# Altium PCB new_food_box_board.PcbDoc (part 1 of 2)
Units mil, origin at the board's own origin, x right, y up, seen from the top; angles counter-clockwise.
Board outline 2685 x 2040 mil, 4 copper layers (Top Layer, Int1 (GND), Int2 (PWR), Bottom Layer), stack 53.912 mil thick; 76 components, 57 nets, 292 pads, 22 vias.
Unrouted connection lines stored in the file: 200.
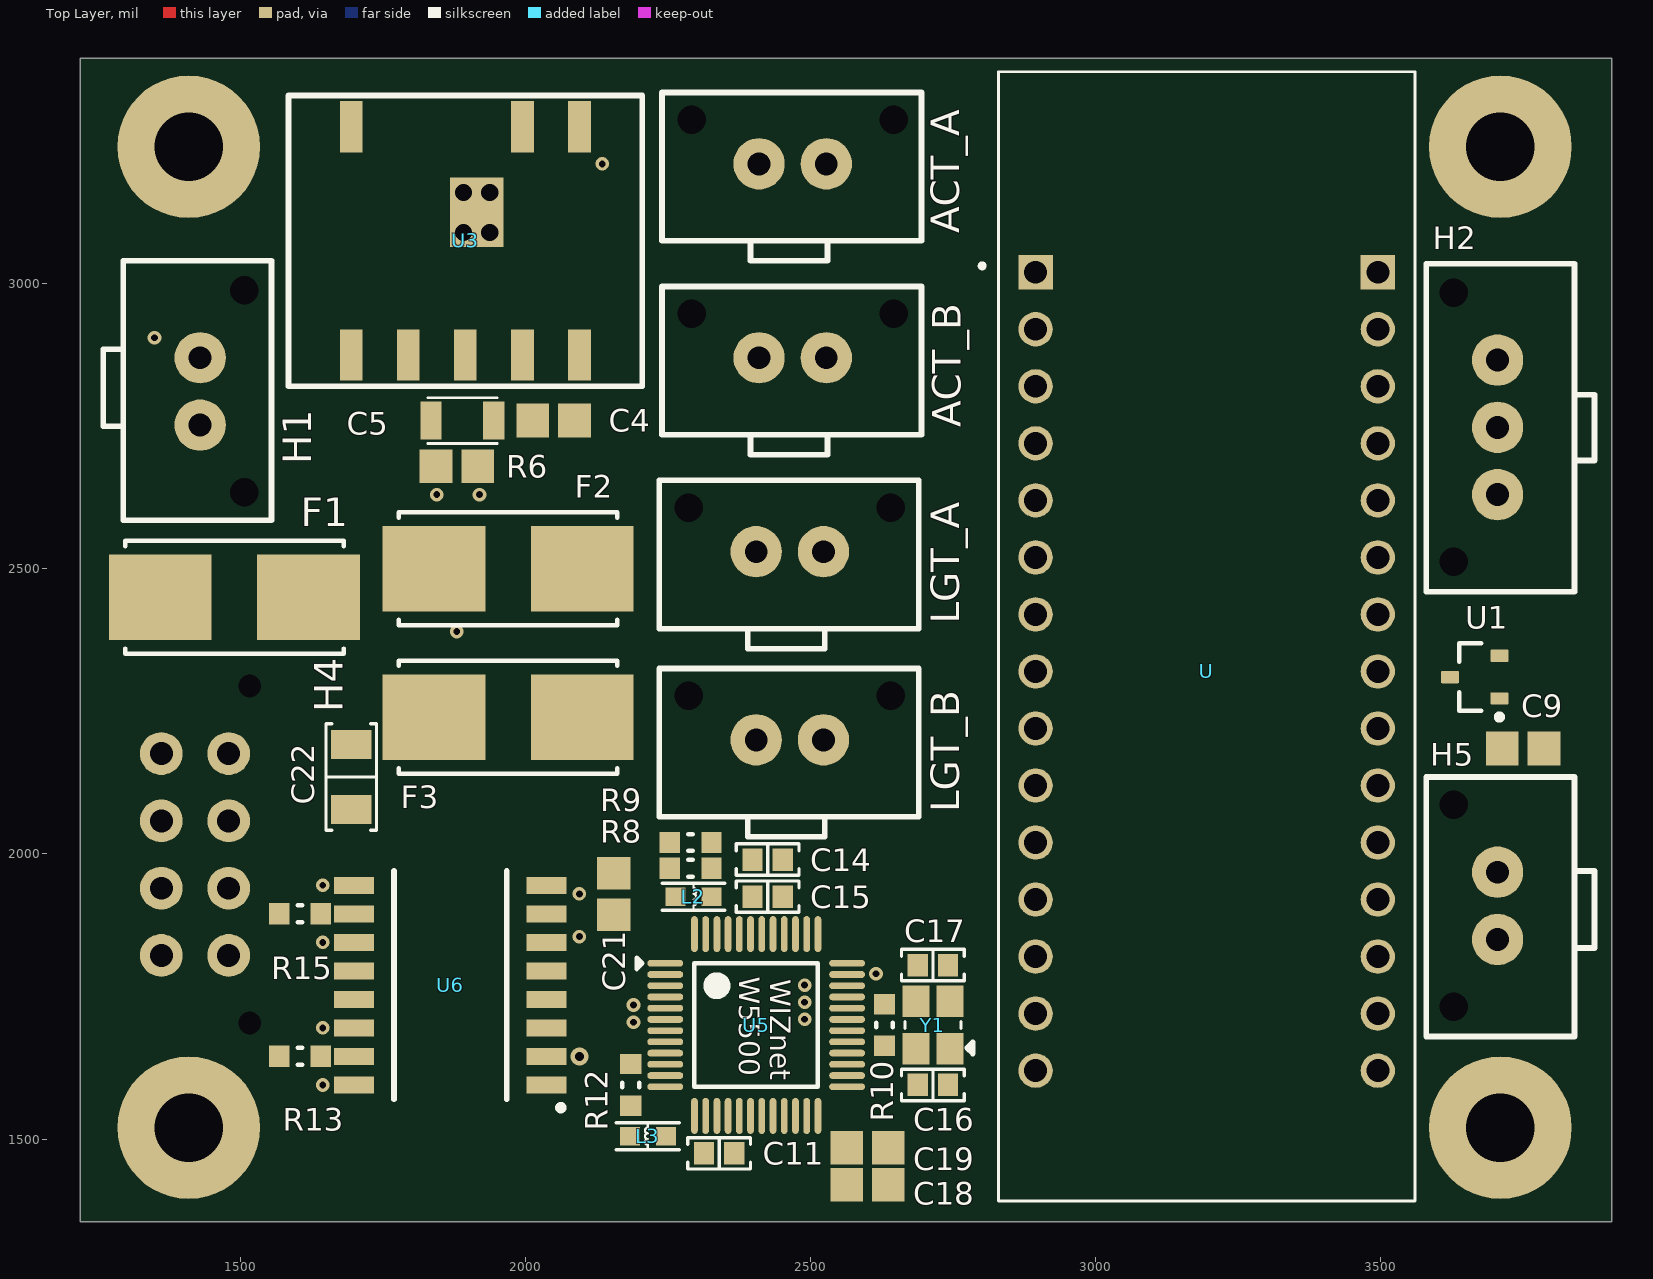
[diagram p0: Top Layer view]
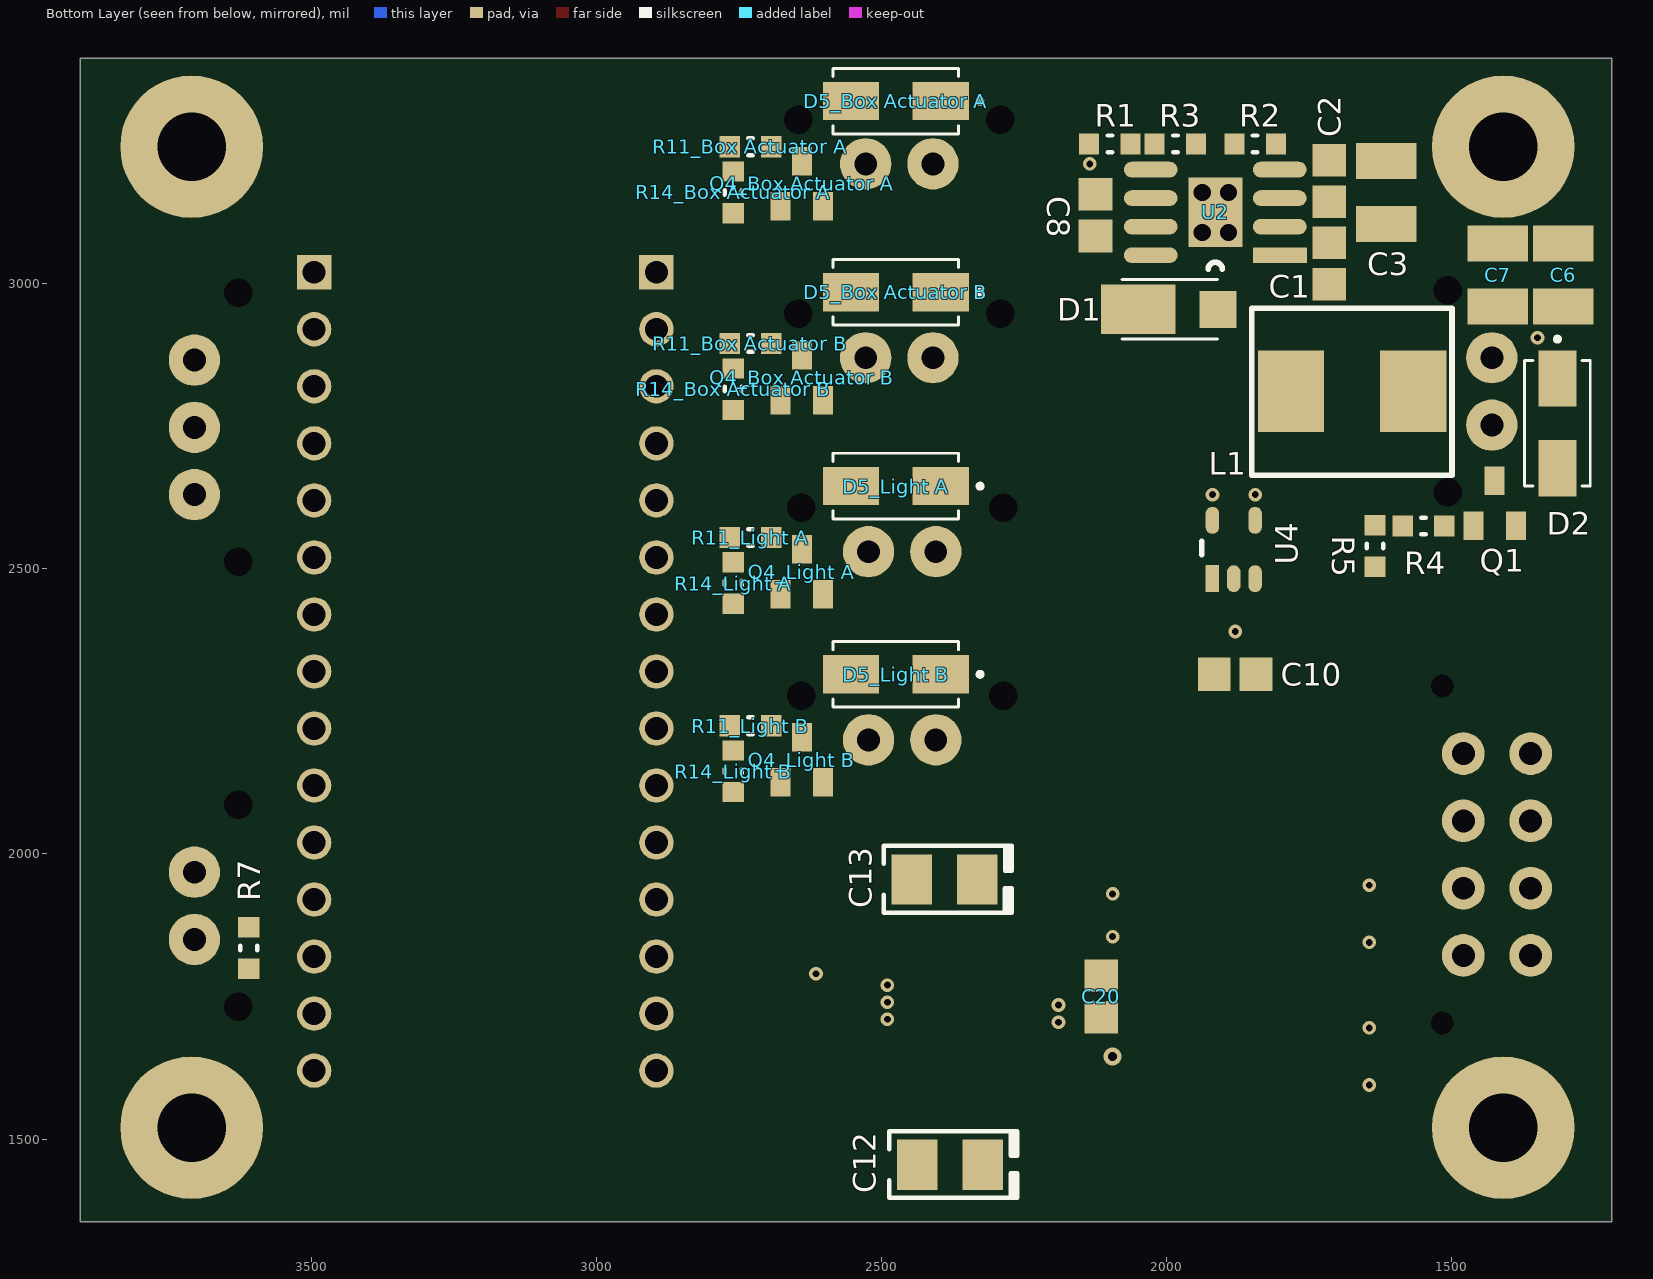
[diagram p1: Bottom Layer view, seen from below]

## Layer stack, top to bottom
Top Solder: solder mask 1, SM-001, Dk 4
Top Layer: signal copper 1.378
Dielectric 1: prepreg 5.1, PP-017, Dk 4.3
Dielectric 2: prepreg 5.1, PP-017, Dk 4.3
Int1 (GND): signal copper 1.378
Dielectric 3: core 28, Core-039, Dk 4.8
Int2 (PWR): signal copper 1.378
Dielectric 4: prepreg 5.1, PP-017, Dk 4.3
Dielectric 5: prepreg 5.1, PP-017, Dk 4.3
Bottom Layer: signal copper 1.378
Bottom Solder: solder mask 1, SM-001, Dk 4

## Board outline
1220,1355 3905,1355 3905,3395 1220,3395

## Design rules (kind name [scope] priority, off if disabled: settings)
BoardOutlineClearance JLC_BoardOutlineClearance_Silk [OnLayer('Top Overlay')  or   OnLayer('Bottom Overlay')] p1: gap=0 ignorepadtopadclearanceinfootprint=FALSE
BoardOutlineClearance JLC_BoardOutlineClearance_Single [All] p2: gap=15.75 ignorepadtopadclearanceinfootprint=FALSE except(0: Arc-SplitContinuation Track-SplitContinuation SMDPad-SplitContinuation THPad-SplitContinuation Via-SplitContinuation Fill-SplitContinuation Poly-SplitContinuation Region-SplitContinuation Text-SplitContinuation; 7.87: Arc-OutlineEdge Track-OutlineEdge SMDPad-OutlineEdge THPad-OutlineEdge Via-OutlineEdge Fill-OutlineEdge Poly-OutlineEdge Region-OutlineEdge Text-OutlineEdge)
BoardOutlineClearance JLC_BoardOutlineClearance_Panel [All] p3: gap=15.75 ignorepadtopadclearanceinfootprint=FALSE except(0: Arc-SplitContinuation Track-SplitContinuation SMDPad-SplitContinuation THPad-SplitContinuation Via-SplitContinuation Fill-SplitContinuation Poly-SplitContinuation Region-SplitContinuation Text-SplitContinuation)
Clearance JLC_Clearance_SB [(HasFootprint('0603 Solder Bridge-Footprint-1'))] p1: gap=5 ignorepadtopadclearanceinfootprint=FALSE except(0: Fill-Hole Poly-Hole Region-Hole Text-Hole; 10: SMDPad-Fill SMDPad-Poly SMDPad-Region THPad-Fill THPad-Poly THPad-Region Via-Fill Via-Poly Via-Region)
Clearance JLC_Clearance_Top [All] p2: gap=5 ignorepadtopadclearanceinfootprint=FALSE except(0: Fill-Hole Poly-Hole Region-Hole Text-Hole; 10: SMDPad-Fill SMDPad-Poly SMDPad-Region THPad-Fill THPad-Poly THPad-Region Via-Fill Via-Poly Via-Region Fill-Fill Fill-Poly Fill-Region Poly-Poly Poly-Region Region-Region)
ComponentClearance JLC_ComponentClearance [All] p1: gap=0 collisioncheckmode=3 verticalgap=0 showdistances=FALSE
ComponentOrientations JLC_ComponentOrientations [All] p1: allowedrotations=32
DiffPairsRouting [All] p1: maxlimit=10 minlimit=10 mostfreqgap=10 toplayer_minwidth=15 toplayer_maxwidth=15 toplayer_prefwidth=15 midlayer1_minwidth=15 midlayer1_maxwidth=15 midlayer1_prefwidth=15 midlayer2_minwidth=15 midlayer2_maxwidth=15 midlayer2_prefwidth=15 bottomlayer_minwidth=15 bottomlayer_maxwidth=15 bottomlayer_prefwidth=15 maxuncoupledlength=500
Height JLC_Height [All] p1: minheight=0 maxheight=99999 prefheight=500
HoleSize JLC_HoleSize [All] p1: absolutevalues=TRUE maxlimit=39370.08 minlimit=12 maxpercent=80.000 minpercent=20.000
HoleToHoleClearance JLC_HoleToHoleClearance [All] p1: gap=12 allowstackedmicrovias=TRUE
MinimumAnnularRing JLC_MinimumAnnularRing [All] p1: minimumring=3
MinimumSolderMaskSliver JLC_MinimumSolderMaskSliver [All] p1: minsoldermaskwidth=0
PolygonConnect [All] p1: connectstyle=Relief reliefconductorwidth=10 reliefentries=4 polygonreliefangle="90 Angle" airgapwidth=10
RoutingVias JLC_RoutingVias [All] p1: holewidth=15 width=25 viastyle="Through Hole" minholewidth=12 minwidth=24 maxholewidth=248 maxwidth=500
SilkToSilkClearance JLC_SilkToSilkClearance [All] p1: silktosilkclearance=0
SilkToSolderMaskClearance JLC_SilkToSolderMaskClearance [IsPad] p1: minsilkscreentomaskgap=0 clearancetoexposedcopper=TRUE
SolderMaskExpansion [All] p1: expansion=4 istentingtop=FALSE
Width JLC_Width [All] p1: maxlimit=500 minlimit=5 preferedwidth=10
22 further rules are at their usual default settings.

## Classes and differential pairs
channel class actuator: "Box Actuator A" "Box Actuator B" "Light A" "Light B"
component class "Power Supply": C1 C2 C3 C4 C5 C6 C7 C8 D1 F1 L1 R1 R2 R3 U2 U3
component class "Light B": "D5_Light B" LGT_B "Q4_Light B" "R11_Light B" "R14_Light B"
component class "Light A": "D5_Light A" LGT_B "Q4_Light A" "R11_Light A" "R14_Light A"
component class I/O: C9 C10 D2 F2 F3 H1 H2 H5 Q1 R4 R5 R6 R7 U1 U4
component class Ethernet: C11 C12 C13 C14 C15 C16 C17 C18 C19 C20 C21 C22 H4 L2 L3 R8 R9 R10 R12 R13 R15 U5 U6 Y1
component class Controller: U
component class "Box Actuator B": ACT_B "D5_Box Actuator B" "Q4_Box Actuator B" "R11_Box Actuator B" "R14_Box Actuator B"
component class "Box Actuator A": ACT_A "D5_Box Actuator A" "Q4_Box Actuator A" "R11_Box Actuator A" "R14_Box Actuator A"
differential pair ETH_TX: +ETH_TX_P -ETH_TX_N
differential pair ETH_RX: +ETH_RX_P -ETH_RX_N
differential pair CHP_TX: +CHP_TX_P -CHP_TX_N
differential pair CHP_RX: +CHP_RX_P -CHP_RX_N

## Components (designator, comment, footprint, x,y, rotation, side; value= is the part's Value field where it differs from the comment)
ACT_A "MOLEX_43650_2" MOLEX_43650_2 2410,3210 r180 top locked (schematic designator H3)
ACT_B "MOLEX_43650_2" MOLEX_43650_2 2410,2870 r180 top locked (schematic designator H3)
C1 "value" "CAP 0805 L" 1715,3035 r270 bottom
C2 "value" "CAP 0805 L" 1715,3180 r270 bottom
C3 "value" 1210 1615,3160 r270 bottom
C4 "value" "CAP 0805 L" 2050,2760 r0 top
C5 "value" 1206_CAP 1890,2760 r180 top
C6 "value" 1210 1305,3015 r270 bottom
C7 "value" 1210 1420,3015 r270 bottom
C8 "value" "CAP 0805 L" 2125,3120 r90 bottom value=22nF
C9 "value" "CAP 0805 L" 3750,2185 r180 top
C10 "value" "CAP 0805 L" 1880,2315 r180 bottom
C11 "0.1µF" "CAP 0603_1608" 2340,1475 r0 top
C12 "10µF" "CAP POL 1411_3528" 2380,1455 r0 bottom
C13 "10µF" "CAP POL 1411_3528" 2390,1955 r0 bottom
C14 "0.1µF" "CAP 0603_1608" 2425,1990 r180 top
C15 "0.1µF" "CAP 0603_1608" 2425,1925 r180 top
C16 "18pF" "CAP 0603_1608" 2715,1595 r0 top
C17 "18pF" "CAP 0603_1608" 2715,1805 r180 top
C18 "4.7uF" "CAP 0805 L" 2600,1420 r180 top
C19 "4.7uF" "CAP 0805 L" 2600,1485 r180 top
C20 "0.1uF" "CAP 0805 L" 2115,1750 r270 bottom
C21 "0.1uF" "CAP 0805 L" 2155,1930 r270 top
C22 "1000pF" "CAP 1206_3216 - 1.8MM" 1695,2135 r270 top
D1 "D Schottky" DO-221BC 1995,2955 r180 bottom
D2 "S1M-13-F" SMA 1315,2755 r270 bottom
"D5_Box Actuator A" "S1M-13-F" SMA 2475,3320 r0 bottom (schematic designator D5)
"D5_Box Actuator B" "S1M-13-F" SMA 2475,2985 r0 bottom (schematic designator D5)
"D5_Light A" "S1M-13-F" SMA 2475,2645 r0 bottom (schematic designator D5)
"D5_Light B" "S1M-13-F" SMA 2475,2315 r0 bottom (schematic designator D5)
F1 "0154005.DRT" Littelfuse_0154_0 1490,2450 r0 top
F2 "0154001.DRT" Littelfuse_0154_0 1970,2500 r0 top locked
F3 "0154001.DRT" Littelfuse_0154_0 1970,2240 r0 top
H1 "MOLEX_43650_2" MOLEX_43650_2 1430,2870 r90 top locked
H2 "POS" MOLEX_43650_3 3705,2630 r270 top
H4 "43045_8P" MOLEX_43045_2X4 1480,1940 r270 top locked
H5 "MOLEX_43650_2" MOLEX_43650_2 3705,1850 r270 top locked
L1 "Inductor Iron" SRP7050TA 1675,2811 r180 bottom locked
L2 "BLM18KG102SZ1D" IND-0603 2295,1925 r0 top
L3 "BLM18KG102SZ1D" IND-0603 2215,1505 r180 top
LGT_A "MOLEX_43650_2" MOLEX_43650_2 2405,2530 r180 top locked (schematic designator H3)
LGT_B "MOLEX_43650_2" MOLEX_43650_2 2405,2200 r180 top locked (schematic designator H3)
Q1 "MOSFET-N" SOT23-3 1425,2615 r180 bottom
"Q4_Box Actuator A" "MOSFET-N" SOT23-3 2640,3175 r180 bottom (schematic designator Q4)
"Q4_Box Actuator B" "MOSFET-N" SOT23-3 2640,2835 r180 bottom (schematic designator Q4)
"Q4_Light A" "MOSFET-N" SOT23-3 2640,2495 r180 bottom (schematic designator Q4)
"Q4_Light B" "MOSFET-N" SOT23-3 2640,2165 r180 bottom (schematic designator Q4)
R1 "Res1" "RES 0603 L" 2100,3245 r0 bottom
R2 "Res1" "RES 0603 L" 1845,3245 r180 bottom
R3 "Res1" "RES 0603 L" 1985,3245 r0 bottom
R4 "value" "RES 0603 L" 1550,2575 r180 bottom
R5 "value" "RES 0603 L" 1635,2540 r90 bottom
R6 "10mR" "CAP 0805 L" 1880,2680 r180 top
R7 "value" "RES 0603 L" 3610,1835 r270 bottom
R8 "4.7K" "RES 0603 L" 2290,1975 r0 top
R9 "4.7K" "RES 0603 L" 2290,2020 r0 top
R10 "1M" "RES 0603 L" 2630,1700 r90 top
"R11_Box Actuator A" "value" "RES 0603 L" 2730,3240 r0 bottom (schematic designator R11)
"R11_Box Actuator B" "value" "RES 0603 L" 2730,2895 r0 bottom (schematic designator R11)
"R11_Light A" "value" "RES 0603 L" 2730,2555 r0 bottom (schematic designator R11)
"R11_Light B" "value" "RES 0603 L" 2730,2225 r0 bottom (schematic designator R11)
R12 "12.4K" "RES 0603 L" 2185,1595 r90 top
R13 "75" "RES 0603 L" 1605,1645 r0 top
"R14_Box Actuator A" "value" "RES 0603 L" 2760,3160 r90 bottom (schematic designator R14)
"R14_Box Actuator B" "value" "RES 0603 L" 2760,2815 r90 bottom (schematic designator R14)
"R14_Light A" "value" "RES 0603 L" 2760,2475 r90 bottom (schematic designator R14)
"R14_Light B" "value" "RES 0603 L" 2760,2145 r90 bottom (schematic designator R14)
R15 "75" "RES 0603 L" 1605,1895 r0 top
U "NUCLEO-L432KC" MODULE_NUCLEO-L432KC 3195,2381.61 r0 top locked
U1 "LM61CIM3/NOPB" DBZ0003A_L 3665,2310 r180 top
U2 "LMR14050" HSOIC-8 1801.81,3050 r0 bottom
U3 "DC-DC_3v3" V78E-1000-SMT 1595,3075 r0 top locked
U4 "INA186" SOT23-5 1920,2482.64 r90 bottom
U5 "W5500" "WIZNET W5500" 2405,1700 r270 top locked
U6 "H1102NL" H1102NL 2037.5,1595 r180 top
Y1 "25MHz" OSC-82J0626 2715,1700 r90 top

## Footprints (in the part's own frame and the unit in brackets; to place one, negate y for a bottom-side part, rotate by r counter-clockwise, add the part's x,y. Pads: shape width x height; smd on the part's side, far side on the other; paste and mask are expansions set on the pad)
1206_CAP [mm] "RESC3115X65N"
  rect 0.95x1.7 smd: 1(-1.4,0) 2(1.4,0)
  silkscreen extent -1.55,-1.02 1.55,1.02
1210 [mm]
  rect 1.6x2.7 smd: 1(-1.4,0) 2(1.4,0)
"CAP 0603_1608" [mm] "Chip Capacitor, 2-Leads, Body 1.60x0.80mm, IPC Medium Density"
  rect 0.9x1 smd: 1(-0.675,0) 2(0.675,0)
  silkscreen extent -1.4,-0.7 1.4,0.7, body extent -0.8,-0.41 0.8,0.41, height 0.82
"CAP 0805 L" [mm] "Chip Capacitor, 2-Leads, Body 2.00x1.25mm, IPC Low Density"
  rect 1.45x1.5 smd: 1(-0.925,0) 2(0.925,0)
  body extent -1.05,-0.67 1.05,0.67, height 1.35
"CAP 1206_3216 - 1.8MM" [mm] "Chip Capacitor, 2-Leads, Body 3.25x1.60mm, IPC Medium Density"
  rect 1.3x1.8 smd: 1(-1.45,0) 2(1.45,0)
  silkscreen extent -2.37,-1.12 2.37,1.12, body extent -1.6,-0.8 1.6,0.8, height 1.8
"CAP POL 1411_3528" [mm] "Molded Capacitor, 2-Leads, Body 3.50x2.80mm, IPC Medium Density"
  rect 1.8x2.23 smd: 1(-1.46,0) 2(1.46,0)
  silkscreen extent -3,-1.5 2.71,1.48, body extent -1.86,-1.45 1.87,1.45, height 2
DBZ0003A_L [mm] "SOT23, 3-Leads, Body 3.04x1.4mm, Pitch 0.95mm, IPC High Density"
  rrect18% 0.8x0.55 smd: 1(-1.1,0.95) 2(-1.1,-0.95) 3(1.1,0)
  silkscreen extent -1.23,-1.5 0.7,1.9, body extent -1.26,-1.46 1.26,1.46, height 0.96
DO-221BC [mil]
  rect 65x65 smd: 1(85,0)
  rect 130x86.61 smd: 2(-55,0)
  silkscreen extent -84,-52 84,52, body extent -101,-52 104,50, height 39
H1102NL [mil]
  rect 70x30 smd: 1(0,0) 2(0,-50) 3(0,-100) 4(0,-150) 5(0,-200) 6(0,-250) 7(0,-300) 8(0,-350) 9(337.5,-350) 10(337.5,-300) 11(337.5,-250) 12(337.5,-200) 13(337.5,-150) 14(337.5,-100) 15(337.5,-50) 16(337.5,0)
  Top Layer pour cut-out: -40,75 375,75 375,-425 -40,-425
  Bottom Layer pour cut-out: -40,75 375,75 375,-425 -40,-425
  silkscreen extent -30,-375 268,45, body extent -17,-425 358,75, height 234
HSOIC-8 [mm]
  rect 2.4x0.7 smd: 1(0,0)
  oval 2.4x0.7 smd: 2(0,-1.27) 3(0,-2.54) 4(0,-3.81) 5(5.75,-3.81) 6(5.75,-2.54) 7(5.75,-1.27) 8(5.75,0)
  rect 2.4x3.1 smd: 7(2.87,-1.905)
  rect 2.4x3.1 smd far side: 7(2.875,-1.905)
  silkscreen extent 2.56,0.32 3.19,0.64, body extent -0.12,-4.35 5.88,0.55, height 1.57
IND-0603 [mm] "Inductor 0603(1608)"
  rect 0.89x0.82 smd: 1(-0.8,0) 2(0.8,0)
  silkscreen extent -1.4,-0.6 1.4,0.6, body extent -0.8,-0.4 0.8,0.4, height 0.95
Littelfuse_0154_0 [mil]
  rect 180x150 smd paste+0 mask+0: 1(-130,0) 2(130,0)
  silkscreen extent -192,-99 192,99, body extent -213,-103 213,103, height 10
MODULE_NUCLEO-L432KC [mm]
  rect 1.53x1.53 hole 1.02: CN3_1(-7.62,16.215) CN4_1(7.62,16.215)
  round 1.53 hole 1.02: CN3_2(-7.62,13.675) CN3_3(-7.62,11.135) CN3_4(-7.62,8.595) CN3_5(-7.62,6.055) CN3_6(-7.62,3.515) CN3_7(-7.62,0.975) CN3_8(-7.62,-1.565) CN3_9(-7.62,-4.105) CN3_10(-7.62,-6.645) CN3_11(-7.62,-9.185) CN3_12(-7.62,-11.725) CN3_13(-7.62,-14.265) CN3_14(-7.62,-16.805) CN3_15(-7.62,-19.345) CN4_2(7.62,13.675) CN4_3(7.62,11.135) CN4_4(7.62,8.595) CN4_5(7.62,6.055) CN4_6(7.62,3.515) CN4_7(7.62,0.975) CN4_8(7.62,-1.565) CN4_9(7.62,-4.105) CN4_10(7.62,-6.645) CN4_11(7.62,-9.185) CN4_12(7.62,-11.725) CN4_13(7.62,-14.265) CN4_14(7.62,-16.805) CN4_15(7.62,-19.345)
  silkscreen extent -10.1,-25.14 9.27,25.14, body extent -9.27,-25.78 9.27,26.23, height 6.38
MOLEX_43045_2X4 [mil] "MOLEX 43045 3.0mm 8P"
  round 0 hole 40: 0(-354.5,37) 0(236.5,37)
  round 75 hole 40: 1(118,-118) 2(0,-118) 3(-118,-118) 4(-236,-118) 5(118,0) 6(0,0) 7(-118,0) 8(-236,0)
  body extent -378,-215 258,130, height 391
MOLEX_43650_2 [mil] "Molex Microfit 3.0 2P"
  round 40 hole 50: 0(-236,-77) 0(118,-77)
  round 90 hole 40: 1(0,0) 2(-118,0)
  silkscreen extent -285,-125 170,170, body extent -250,-95 130,126, height 395
MOLEX_43650_3 [mil] "Molex Microfit 3MM connector 3-pin"
  round 40 hole 50: 0(-354,-77) 0(118,-77)
  round 90 hole 40: 1(0,0) 2(-118,0) 3(-236,0)
  silkscreen extent -405,-125 170,170, body extent -367,-97 131,123, height 395
OSC-82J0626 [mm]
  rect 1.4x1.2 smd: 1(-1.05,-0.75) 2(1.05,-0.75) 3(1.05,0.75) 4(-1.05,0.75)
  silkscreen extent -1.27,-1.78 0.15,1.25, body extent -1.7,-1.35 1.7,1.35, height 1.06
"RES 0603 L" [mm] "Chip Resistor, 2-Leads, Body 1.60x0.80mm, IPC Low Density"
  rect 0.9x0.95 smd: 1(-0.925,0) 2(0.925,0)
  silkscreen extent -0.1,-0.38 0.1,0.38, body extent -0.8,-0.4 0.8,0.4, height 0.45
SMA [mm]
  rect 2.5x1.7 smd: 1(2,0) 2(-2,0)
  silkscreen extent -3.85,-1.46 2.8,1.46, body extent -2.64,-1.46 2.64,1.46, height 2.41
SOT23-3 [mm]
  rect 0.889x1.27 smd: 1(0,1) 2(-0.95,-1) 3(0.95,-1)
  body extent -1.45,-1.27 1.45,1.13, height 0.96
SOT23-5 [mm]
  rect 1.2x0.6 smd: 1(0,0)
  oval 1.2x0.6 smd: 2(0,-0.95) 3(0,-1.9) 4(2.6,-1.9) 5(2.6,0)
  silkscreen extent 1.06,0.48 1.66,0.48, body extent -0.33,-2.44 2.87,0.56, height 0.92
SRP7050TA [mil] "Bourns SRP7050TA series"
  rect 116.5x143 smd: 1(-107.25,0) 2(107.25,0)
  silkscreen extent -176,-147 175,146, body extent -144,-130 144,130, height 181
V78E-1000-SMT [mil]
  rect 40x90 smd: 1(100,200) 2(300,-200) 2(400,200) 3(100,-200) 3(200,-200) 4(400,-200) 4(500,-200) 5(500,200)
  silkscreen extent -10,-255 610,255, body extent 0,-224 600,224, height 326
"WIZNET W5500" [mm]
  oval 0.3x1.6 smd: 1(-2.75,-4.05) 2(-2.25,-4.05) 3(-1.75,-4.05) 4(-1.25,-4.05) 5(-0.75,-4.05) 6(-0.25,-4.05) 7(0.25,-4.05) 8(0.75,-4.05) 9(1.25,-4.05) 10(1.75,-4.05) 11(2.25,-4.05) 12(2.75,-4.05) 25(2.75,4.05) 26(2.25,4.05) 27(1.75,4.05) 28(1.25,4.05) 29(0.75,4.05) 30(0.25,4.05) 31(-0.25,4.05) 32(-0.75,4.05) 33(-1.25,4.05) 34(-1.75,4.05) 35(-2.25,4.05) 36(-2.75,4.05)
  oval 1.6x0.3 smd: 13(4.05,-2.75) 14(4.05,-2.25) 15(4.05,-1.75) 16(4.05,-1.25) 17(4.05,-0.75) 18(4.05,-0.25) 19(4.05,0.25) 20(4.05,0.75) 21(4.05,1.25) 22(4.05,1.75) 23(4.05,2.25) 24(4.05,2.75) 37(-4.05,2.75) 38(-4.05,2.25) 39(-4.05,1.75) 40(-4.05,1.25) 41(-4.05,0.75) 42(-4.05,0.25) 43(-4.05,-0.25) 44(-4.05,-0.75) 45(-4.05,-1.25) 46(-4.05,-1.75) 47(-4.05,-2.25) 48(-4.05,-2.75)
  silkscreen extent -3,-5.32 2.75,2.75, body extent -4.5,-4.5 4.5,4.5, height 1.65

## Part data
ACT_A ACT_B H1 H5 LGT_A LGT_B: "MOLEX - 43650-0227 - Wire-To-Board Connector, 3 mm, 2 Contacts, Header, Micro-Fit 3.0 43650 Series, Through Hole, 1 Rows", Color=Black, Manufacturer=Molex, Manufacturer Part Number=43650-0227, Max Operating Temperature=105°C, Min Operating Temperature=-40°C, Package Quantity=3264, Supplier Part Number 1=WM10656-ND, Category=Connectors, ComponentLink1Description=https://datasheet.ciiva.com/6840/436500227-sd-6840390.pdf?src-supplier=Digi-Key, ComponentLink1URL=https://datasheet.ciiva.com/6840/436500227-sd-6840390.pdf?src-supplier=Digi-Key, ComponentLink2Description=https://datasheet.ciiva.com/3944/28290436500227-pcb-headers-3944690.pdf?src-supplier=Arrow, ComponentLink2URL=https://datasheet.ciiva.com/3944/28290436500227-pcb-headers-3944690.pdf?src-supplier=Arrow, ComponentLink3Description=https://datasheet.ciiva.com/30077/0436500227-pcb-headers-30077244.pdf?src-supplier=Onlinecomponents.com, ComponentLink3URL=https://datasheet.ciiva.com/30077/0436500227-pcb-headers-30077244.pdf?src-supplier=Onlinecomponents.com, ComponentLink4Description=https://datasheet.ciiva.com/7920/1629867-7920765.pdf?src-supplier=Element14, ComponentLink4URL=https://datasheet.ciiva.com/7920/1629867-7920765.pdf?src-supplier=Element14, Connector Type="Header,Male Pin", Contact Material=Brass, Contact Plating=Tin,Bright, Contact Shape=Square, Depth=5.57mm, Fastening Type=Ramp, Housing Material=Thermoplastic, Insulation Material=Polymer, Length=9.65mm, Mount="Through Hole", Number of Contacts=2, Number of Ports=1, Number of Positions=2, Number of Rows=1, Number of Terminals=2, Orientation=Straight, Packaging=Tray, Pitch=3mm, Pricing 1="1=0.80000, 10=0.74800, 100=0.57340, 500=0.49860, 1000=0.41135, 5000=0.36149, 10000=0.33656 (USD)", Supplier 1=Digi-Key, Termination=Solder
C1 C2: library part "CAP 0805", "CAP CER 0.1UF 50V X7R 0805", Capacitance=0.1uF, Case/Package=0805, Dielectric=X7R, Manufacturer=Samsung, Manufacturer Part Number=CL21B104KBC5PNL, Max Operating Temperature=125°C, Min Operating Temperature=-55°C, Supplier Part Number 1=1276-7000-1-ND, Tolerance=10%, Voltage=50V, Category="Ceramic Capacitors", ComponentLink1Description=https://datasheet.ciiva.com/15195/getdatasheetpartid-359581-15195873.pdf?src-supplier=Verical, ComponentLink1URL=https://datasheet.ciiva.com/15195/getdatasheetpartid-359581-15195873.pdf?src-supplier=Verical, Depth=1.25mm, Height=0.85mm, Length=2mm, Mount="Surface Mount", Packaging="Tape and Reel", Pricing 1="1=0.10000, 10=0.06800, 50=0.03720, 100=0.03040, 500=0.02168, 1000=0.01704, 2500=0.01549, 5000=0.01425 (USD)", Radiation Hardening=No, Supplier 1=Digi-Key
C3: library part "CAP 0805", "TDK - C3225X7R1H106M250AC - C3225X7R1H106MT000E", Capacitance=10uF, Case Code (Imperial)=1210, Case Code (Metric)=3225, Dielectric=X7R, Dielectric Material=Ceramic, Manufacturer=TDK, Manufacturer Part Number=C3225X7R1H106M250AC, Max Operating Temperature=125°C, Min Operating Temperature=-55°C, Package Quantity=1000, Supplier Part Number 1=445-14933-1-ND, Tolerance=20%, Voltage Rating=50V, Case/Package=1210, Category="Ceramic Capacitors", ComponentLink1Description=http://www.farnell.com/datasheets/2792994.pdf?src-supplier=Farnell, ComponentLink1URL=http://www.farnell.com/datasheets/2792994.pdf?src-supplier=Farnell, ComponentLink2Description=http://www.mouser.com/ds/2/400/tdk_mlcc_commercial_general_en-542463.pdf?src-supplier=Mouser, ComponentLink2URL=http://www.mouser.com/ds/2/400/tdk_mlcc_commercial_general_en-542463.pdf?src-supplier=Mouser, ComponentLink3Description=https://product.tdk.com/info/en/documents/chara_sheet/C3225X7R1H106M250AC.pdf?src-supplier=Digi-Key, ComponentLink3URL=https://product.tdk.com/info/en/documents/chara_sheet/C3225X7R1H106M250AC.pdf?src-supplier=Digi-Key, ComponentLink4Description=http://product.tdk.com/capacitor/mlcc/en/documents/mlcc_commercial_general_en.pdf?src-supplier=Avnet, ComponentLink4URL=http://product.tdk.com/capacitor/mlcc/en/documents/mlcc_commercial_general_en.pdf?src-supplier=Avnet, ComponentLink5Description=http://www.farnell.com/datasheets/1913358.pdf?src-supplier=Element14, ComponentLink5URL=http://www.farnell.com/datasheets/1913358.pdf?src-supplier=Element14, ComponentLink6Description=http://www.farnell.com/datasheets/2291921.pdf?src-supplier=Newark, ComponentLink6URL=http://www.farnell.com/datasheets/2291921.pdf?src-supplier=Newark, Height=2.5mm, Lead Free="Lead Free", Length=0.126inch, Mount="Surface Mount", Packaging="Tape and Reel", Pricing 1="1=1.03000, 10=0.78700, 50=0.65340, 100=0.56270, 500=0.43560 (USD)", REACH SVHC="No SVHC", Supplier 1=Digi-Key, Termination=SMD/SMT, Thickness=0.11inch, Voltage Rating (DC)=50V, Weight=0.000564oz, Width=0.098inch
C4: library part "CAP 0805", "CAP CER 22UF 10V X6S 0805", Capacitance=22uF, Case Code (Imperial)=0805, Case Code (Metric)=2012, Manufacturer=Murata, Manufacturer Part Number=GRT21BC81A226ME13L, Max Operating Temperature=105°C, Min Operating Temperature=-55°C, Ratings=AEC-Q200, Supplier Part Number 1=490-12342-1-ND, Tolerance=20%, Voltage Rating=10V, Case/Package=0805, Category="Ceramic Capacitors", ComponentLink1Description=http://search.murata.co.jp/Ceramy/image/img/A01X/G101/ENG/GRT21BC81A226ME13-01.pdf?src-supplier=Digi-Key, ComponentLink1URL=http://search.murata.co.jp/Ceramy/image/img/A01X/G101/ENG/GRT21BC81A226ME13-01.pdf?src-supplier=Digi-Key, Lead Free="Lead Free", Length=0.079inch, Mount="Surface Mount", Packaging="Tape and Reel", Pricing 1="1=0.61000, 10=0.42900, 50=0.32460, 100=0.28260, 500=0.20938, 1000=0.17796 (USD)", Supplier 1=Digi-Key, Thickness=0.057inch, Width=0.049inch
C5: library part "CAP 0805", "MURATA - GRT31CR61H106KE01L - SMD Multilayer Ceramic Capacitor, 10 µF, 50 V, 1206 [3216 Metric], ± 10%, X5R, GRT Series", Capacitance=10uF, Case Code (Imperial)=1206, Case Code (Metric)=3216, Dielectric=X5R, Manufacturer=Murata, Manufacturer Part Number=GRT31CR61H106KE01L, Max Operating Temperature=85°C, Min Operating Temperature=-55°C, Ratings=AEC-Q200, Supplier Part Number 1=490-12456-1-ND, Tolerance=10%, Voltage Rating=50V, Case/Package=1206, Category="Ceramic Capacitors", ComponentLink1Description=http://www.farnell.com/datasheets/2166010.pdf?src-supplier=Farnell, ComponentLink1URL=http://www.farnell.com/datasheets/2166010.pdf?src-supplier=Farnell, ComponentLink2Description=http://search.murata.co.jp/Ceramy/image/img/A01X/G101/ENG/GRT31CR61H106KE01-01.pdf?src-supplier=Digi-Key, ComponentLink2URL=http://search.murata.co.jp/Ceramy/image/img/A01X/G101/ENG/GRT31CR61H106KE01-01.pdf?src-supplier=Digi-Key, ComponentLink3Description=http://www.farnell.com/datasheets/2166010.pdf?src-supplier=Newark, ComponentLink3URL=http://www.farnell.com/datasheets/2166010.pdf?src-supplier=Newark, ComponentLink4Description=http://www.farnell.com/datasheets/2166010.pdf?src-supplier=Element14, ComponentLink4URL=http://www.farnell.com/datasheets/2166010.pdf?src-supplier=Element14, Length=0.126inch, Mount="Surface Mount", Packaging="Cut Tape", Pricing 1="1=0.73000, 10=0.51400, 50=0.38840, 100=0.33840, 500=0.25064, 1000=0.21304 (USD)", Supplier 1=Digi-Key, Thickness=0.071inch, Voltage Rating (DC)=50V, Width=0.063inch
C6 C7: library part "CAP 0805", "KEMET - C1210C476M4PACTU. - CAPACITOR CERAMIC 47UF, 16V, X5R, 1210", Capacitance=47uF, Case Code (Imperial)=1210, Case Code (Metric)=3225, Dielectric=X5R, Dielectric Material=Ceramic, Manufacturer=KEMET, Manufacturer Part Number=C1210C476M4PACTU, Max Operating Temperature=85°C, Min Operating Temperature=-55°C, Package Quantity=1, Supplier Part Number 1=399-5514-1-ND, Tolerance=20%, Voltage=16V, Case/Package=1210, Category="Ceramic Capacitors", ComponentLink1Description=https://datasheet.ciiva.com/22705/652158-22705488.pdf?src-supplier=Element14, ComponentLink1URL=https://datasheet.ciiva.com/22705/652158-22705488.pdf?src-supplier=Element14, ComponentLink2Description=https://datasheet.ciiva.com/28608/1918694-28608774.pdf?src-supplier=Element14, ComponentLink2URL=https://datasheet.ciiva.com/28608/1918694-28608774.pdf?src-supplier=Element14, Contact Plating=Tin,Matte, Depth=2.5mm, Dissipation Factor=10%, Height=2.5mm, Lead Free="Lead Free", Length=3.2mm, Mount="Surface Mount,PCB", Number of Pins=2, Packaging="Tape and Reel", Pricing 1="1=1.16000, 10=0.88500, 50=0.73500, 100=0.63300, 500=0.49006 (USD)", Radiation Hardening=No, REACH SVHC="No SVHC", Supplier 1=Digi-Key, Termination=SMD/SMT, Thickness=0.11inch, Voltage Rating=16V, Voltage Rating (DC)=16V, Width=0.098inch
C8: library part "CAP 0805", "CAP 0805", Manufacturer=Yageo, Manufacturer Part Number=AC0805KRX7R8BB223, Supplier Part Number 1=311-3170-1-ND, Voltage=25V, Pricing 1="1=0.24000, 10=0.16300, 100=0.08260, 500=0.05654, 1000=0.05001 (USD)", RoHS=No, Stock 1=1274, Supplier 1=Digi-Key
C9 C10: library part "CAP 0805", "SMD Multilayer Ceramic Capacitor, AEC-Q200 C Series, 0.1 F, 10%, X7R, 25 V, 0805 [2012 Metric] ;RoHS Compliant: Yes", Capacitance=100nF, Case Code (Imperial)=0805, Case Code (Metric)=2012, Dielectric=X7R, Dielectric Material=Ceramic, Manufacturer=KEMET, Manufacturer Part Number=C0805C104K3RACAUTO, Max Operating Temperature=125°C, Min Operating Temperature=-55°C, Package Quantity=1, Ratings=AEC-Q200, Supplier Part Number 1=399-6927-1-ND, Tolerance=10%, Voltage Rating=25V, Case/Package=0805, Category="Ceramic Capacitors", ComponentLink1Description=http://components.arrow.com/part/dataview/43510470S8189391N7429?src-supplier=Arrow, ComponentLink1URL=http://components.arrow.com/part/dataview/43510470S8189391N7429?src-supplier=Arrow, ComponentLink2Description=http://components.arrow.com/part/dataview/0323_00324902?src-supplier=Arrow+Europe, ComponentLink2URL=http://components.arrow.com/part/dataview/0323_00324902?src-supplier=Arrow+Europe, ComponentLink3Description=http://www.farnell.com/datasheets/2314205.pdf?src-supplier=Farnell, ComponentLink3URL=http://www.farnell.com/datasheets/2314205.pdf?src-supplier=Farnell, ComponentLink4Description=http://www.farnell.com/datasheets/2120825.pdf?src-supplier=Farnell, ComponentLink4URL=http://www.farnell.com/datasheets/2120825.pdf?src-supplier=Farnell, ComponentLink5Description=https://www.verical.com/server-webapp/html/getDatasheet?partID=469266&src-supplier=Verical, ComponentLink5URL=https://www.verical.com/server-webapp/html/getDatasheet?partID=469266&src-supplier=Verical, ComponentLink6Description=http://capacitoredge.kemet.com/capedge2/DataSheet?pn=C0805C104K3RACAUTO&src-supplier=Avnet+Europe, ComponentLink6URL=http://capacitoredge.kemet.com/capedge2/DataSheet?pn=C0805C104K3RACAUTO&src-supplier=Avnet+Europe, ComponentLink7Description=http://www.farnell.com/datasheets/2120825.pdf?src-supplier=Element14, ComponentLink7URL=http://www.farnell.com/datasheets/2120825.pdf?src-supplier=Element14, ComponentLink8Description=https://search.kemet.com/component-edge/download/datasheet/C0805C104K3RACAUTO.pdf?src-supplier=Digi-Key, ComponentLink8URL=https://search.kemet.com/component-edge/download/datasheet/C0805C104K3RACAUTO.pdf?src-supplier=Digi-Key, ComponentLink9Description=https://api.kemet.com/component-edge/download/datasheet/C0805C104K3RACAUTO.pdf?src-supplier=Digi-Key, ComponentLink9URL=https://api.kemet.com/component-edge/download/datasheet/C0805C104K3RACAUTO.pdf?src-supplier=Digi-Key, Depth=1.25mm, Height=0.9mm, Length=2mm, Mount="Surface Mount", Packaging="Tape and Reel", Pricing 1="1=0.18000, 10=0.12000, 50=0.07220, 100=0.06100, 500=0.04174, 1000=0.03693 (USD)", Radiation Hardening=No, REACH SVHC="No SVHC", Supplier 1=Digi-Key, Thickness=0.035inch, Voltage Rating (DC)=25V, Width=0.049inch
C11 C14 C15: library part C0603C104K5RACAUTO, "CAP CER 0.1UF 50V X7R 0603", Device Package="0603 (1608 Metric)", Manufacturer=KEMET, Operating Temperature="-55°C ~ 125°C", Ratings=AEC-Q200, Supplier Part Number 1=399-6856-1-ND, Temperature Coefficient=X7R, Tolerance=±10%, Voltage - Rated=50V, Applications="Automotive, Bypass, Decoupling", Capacitance=0.1µF, ComponentLink1Description=Datasheet, ComponentLink1URL=https://api.kemet.com/component-edge/download/specsheet/C0603C104K5RACAUTO.pdf, ComponentLink2Description="DigiKey Link", ComponentLink2URL=http://digikey.com/product-detail/en/kemet/C0603C104K5RACAUTO/399-6856-1-ND/3314369, LastUpdated="2020-01-21 12:01:46 AM", Lifecycle Status=Active, Minimum Order=1, Mounting Type="Surface Mount, MLCC", Package / Case="0603 (1608 Metric)", Packaging=TapeAndReel, Part Number=C0603C104K5RACAUTO, Part Status=Active, PartId=14977, Price=0.03, Series="SMD Auto X7R", Size / Dimension="0.063\" L x 0.031\" W (1.60mm x 0.80mm)", Supplier 1=DigiKey, Thickness (Max)="0.034\" (0.87mm)"
C12 C13: library part T491B106K016ATAUTO, "CAP TANT 10UF 10% 16V 1411", Device Package="1411 (3528 Metric)", ESR (Equivalent Series Resistance)=2.5Ohm, Lifetime @ Temp.="2000 Hrs @ 125°C", Manufacturer=KEMET, Manufacturer Size Code=B, Operating Temperature="-55°C ~ 125°C", Ratings=AEC-Q200, Supplier Part Number 1=399-18036-1-ND, Tolerance=±10%, Voltage - Rated=16V, Capacitance=10µF, ComponentLink1Description=Datasheet, ComponentLink1URL=https://api.kemet.com/component-edge/download/datasheet/T491B106K016ATAUTO.pdf, ComponentLink2Description="DigiKey Link", ComponentLink2URL=http://digikey.com/product-detail/en/kemet/T491B106K016ATAUTO/399-18036-1-ND/9342305, Features=Automotive, Height - Seated (Max)="0.083\" (2.10mm)", LastUpdated="2020-01-21 1:52:37 AM", Lifecycle Status=Active, Minimum Order=1, Mounting Type="Surface Mount", Package / Case="1411 (3528 Metric)", Packaging=TapeAndReel, Part Number=T491B106K016ATAUTO, Part Status=Active, PartId=1682, Price=0.15, Series=T491, Size / Dimension="0.138\" L x 0.110\" W (3.50mm x 2.80mm)", Supplier 1=DigiKey, Type=Molded
C16 C17: library part C0603C180J5GACAUTO, "CAP CER 18PF 50V C0G/NP0 0603", Device Package="0603 (1608 Metric)", Manufacturer=KEMET, Operating Temperature="-55°C ~ 125°C", Ratings=AEC-Q200, Supplier Part Number 1=399-16019-1-ND, Temperature Coefficient="C0G, NP0", Tolerance=±5%, Voltage - Rated=50V, Applications=Automotive, Capacitance=18pF, ComponentLink1Description=Datasheet, ComponentLink1URL=https://api.kemet.com/component-edge/download/datasheet/C0603C180J5GACAUTO.pdf, ComponentLink2Description="DigiKey Link", ComponentLink2URL=http://digikey.com/product-detail/en/kemet/C0603C180J5GACAUTO/399-16019-1-ND/7516518, Features="Low ESL", LastUpdated="2020-01-21 12:01:53 AM", Lifecycle Status=Active, Minimum Order=1, Mounting Type="Surface Mount, MLCC", Package / Case="0603 (1608 Metric)", Packaging=TapeAndReel, Part Number=C0603C180J5GACAUTO, Part Status=Active, PartId=12456, Price=0.02, Series="SMD Auto C0G", Size / Dimension="0.063\" L x 0.031\" W (1.60mm x 0.80mm)", Supplier 1=DigiKey, Thickness (Max)="0.034\" (0.87mm)"
C18 C19: library part "CAP 0805", "Cap Ceramic 4.7uF 16V X7R 10% Pad SMD 0805 125C Automotive T/R", Case Code (Imperial)=0805, Case Code (Metric)=2012, Manufacturer=KEMET, Manufacturer Part Number=C0805C475K4RACAUTO, Max Operating Temperature=125°C, Min Operating Temperature=-55°C, Ratings=AEC-Q200, Supplier Part Number 1=399-15711-1-ND, Tolerance=10%, Voltage Rating=16V, Capacitance=4.7uF, Case/Package=0805, Category="Ceramic Capacitors", ComponentLink1Description=http://www.farnell.com/datasheets/2741390.pdf?src-supplier=Farnell, ComponentLink1URL=http://www.farnell.com/datasheets/2741390.pdf?src-supplier=Farnell, ComponentLink2Description=http://www.farnell.com/datasheets/2741390.pdf?src-supplier=Newark, ComponentLink2URL=http://www.farnell.com/datasheets/2741390.pdf?src-supplier=Newark, ComponentLink3Description=http://www.farnell.com/datasheets/2741390.pdf?src-supplier=Element14, ComponentLink3URL=http://www.farnell.com/datasheets/2741390.pdf?src-supplier=Element14, ComponentLink4Description=https://api.kemet.com/component-edge/download/datasheet/C0805C475K4RACAUTO.pdf?src-supplier=Digi-Key, ComponentLink4URL=https://api.kemet.com/component-edge/download/datasheet/C0805C475K4RACAUTO.pdf?src-supplier=Digi-Key, Mount="Surface Mount", Packaging="Cut Tape", Supplier 1=Digi-Key
C20 C21: library part "CAP 0805", "Cap Ceramic 0.01uF 100V X7R 10% SMD 0805 125C Paper T/R", Capacitance=10nF, Case Code (Imperial)=0805, Case Code (Metric)=2012, Dielectric=X7R, Dielectric Material=Ceramic, Manufacturer=KEMET, Manufacturer Part Number=C0805C103K1RACAUTO, Max Operating Temperature=125°C, Min Operating Temperature=-55°C, Package Quantity=1, Ratings=AEC-Q200, Supplier Part Number 1=399-6922-1-ND, Tolerance=10%, Voltage Rating=100V, Case/Package=0805, Category="Ceramic Capacitors", ComponentLink1Description=https://datasheet.ciiva.com/7842/1693454-7842169.pdf?src-supplier=Element14, ComponentLink1URL=https://datasheet.ciiva.com/7842/1693454-7842169.pdf?src-supplier=Element14, Contact Plating=Tin,Matte, Depth=1.25mm, Height=0.78mm, Length=2mm, Mount="Surface Mount", Packaging="Tape and Reel", Radiation Hardening=No, REACH SVHC="No SVHC", Supplier 1=Digi-Key, Thickness=0.035inch, Voltage Rating (DC)=100V, Width=0.049inch
C22: library part C1206C102KGRACAUTO, "CAP CER 1000PF 2KV X7R 1206", Device Package="1206 (3216 Metric)", Manufacturer=KEMET, Operating Temperature="-55°C ~ 125°C", Ratings=AEC-Q200, Supplier Part Number 1=399-12976-1-ND, Temperature Coefficient=X7R, Tolerance=±10%, Voltage - Rated="2000V (2kV)", Applications="Automotive, Bypass, Decoupling", Capacitance=1000pF, ComponentLink1Description=Datasheet, ComponentLink1URL=https://api.kemet.com/component-edge/download/datasheet/C1206C102KGRACAUTO.pdf, ComponentLink2Description="DigiKey Link", ComponentLink2URL=http://digikey.com/product-detail/en/kemet/C1206C102KGRACAUTO/399-12976-1-ND/5762258, Features="Low ESL, High Voltage", LastUpdated="2020-01-21 12:03:47 AM", Lifecycle Status=Active, Minimum Order=1, Mounting Type="Surface Mount, MLCC", Package / Case="1206 (3216 Metric)", Packaging=TapeAndReel, Part Number=C1206C102KGRACAUTO, Part Status=Active, PartId=20361, Price=0.06, Series="SMD Auto X7R HV", Size / Dimension="0.126\" L x 0.063\" W (3.20mm x 1.60mm)", Supplier 1=DigiKey, Thickness (Max)="0.069\" (1.75mm)"
D1: "Schottky Diode", Average Rectified Current=4A, Forward Current=8A, Forward Voltage=570mV, Manufacturer="Vishay Semiconductors", Manufacturer Part Number=V8PAL50-M3/I, Max Forward Surge Current (Ifsm)=120A, Max Operating Temperature=150°C, Max Repetitive Reverse Voltage (Vrrm)=50V, Min Operating Temperature=-40°C, Package Quantity=14000, Peak Reverse Current=40mA, Supplier Part Number 1=V8PAL50-M3/ICT-ND, Code_JEDEC=DO-214-AA, ComponentLink1Description=https://datasheet.ciiva.com/29591/v8pal50-29591381.pdf?src-supplier=Digi-Key, ComponentLink1URL=https://datasheet.ciiva.com/29591/v8pal50-29591381.pdf?src-supplier=Digi-Key, ComponentLink2Description=https://datasheet.ciiva.com/29591/v8pal50-29591382.pdf?src-supplier=Digi-Key, ComponentLink2URL=https://datasheet.ciiva.com/29591/v8pal50-29591382.pdf?src-supplier=Digi-Key, ComponentLink3Description=https://datasheet.ciiva.com/29591/v8pal50-29591383.pdf?src-supplier=Digi-Key, ComponentLink3URL=https://datasheet.ciiva.com/29591/v8pal50-29591383.pdf?src-supplier=Digi-Key, Element Configuration=Single, Height=1mm, Length=4.35mm, Max Reverse Voltage (DC)=50V, Mount="Surface Mount", Number of Pins=2, PackageDescription="DO-214-AA/SMB; 2 C-Bend Leads; Body 5.3 x 3.6 mm, inc. leads (LxW)", Packaging="Tape and Reel", Peak Non-Repetitive Surge Current=120A, Pricing 1="1=0.87000, 10=0.76600, 25=0.72000, 100=0.52250, 250=0.50388, 500=0.43654, 1000=0.37152, 2500=0.34830, 5000=0.31347 (USD)", REACH SVHC=Unknown, RoHS=Yes, Stock 1=9149, Supplier 1=Digi-Key, Weight=0.001129oz, Width=2.7mm
D2 "D5_Box Actuator A" "D5_Box Actuator B" "D5_Light A" "D5_Light B": library part Diode, "Default Diode"
F1: "FUSE BRD MNT 5A 125VAC/VDC 2SMD", Case/Package=SMD/SMT, Color=White, Current Rating=5A, DC Cold Resistance=13.6mR, Flammability Rating="UL94 V-0", Manufacturer=Littelfuse, Manufacturer Part Number=0154005DRT, Max Operating Temperature=125°C, Min Operating Temperature=-55°C, Package Quantity=1500, Power Dissipation=125W, Supplier Part Number 1=F1310CT-ND, Voltage Rating=125V, Approvals=UL,PSE, Body Material=Ceramic,Thermoplastic, Category=Fuses, ComponentLink1Description=https://datasheet.ciiva.com/15187/getdatasheetpartid-71302-15187877.pdf?src-supplier=Verical, ComponentLink1URL=https://datasheet.ciiva.com/15187/getdatasheetpartid-71302-15187877.pdf?src-supplier=Verical, ComponentLink2Description=https://datasheet.ciiva.com/14159/aa154xxx-data-e-14159686.pdf?src-supplier=Distrelec, ComponentLink2URL=https://datasheet.ciiva.com/14159/aa154xxx-data-e-14159686.pdf?src-supplier=Distrelec, ComponentLink3Description=https://datasheet.ciiva.com/22712/1840330-22712966.pdf?src-supplier=Element14, ComponentLink3URL=https://datasheet.ciiva.com/22712/1840330-22712966.pdf?src-supplier=Element14, ComponentLink4Description=https://datasheet.ciiva.com/1268/1840330-1268664.pdf?src-supplier=Element14, ComponentLink4URL=https://datasheet.ciiva.com/1268/1840330-1268664.pdf?src-supplier=Element14, ComponentLink5Description=https://datasheet.ciiva.com/4483/littelfuse-fuse-154-154t-154l-154tl-datasheet-pdf-309941-4483517.pdf?src-supplier=Mouser, ComponentLink5URL=https://datasheet.ciiva.com/4483/littelfuse-fuse-154-154t-154l-154tl-datasheet-pdf-309941-4483517.pdf?src-supplier=Mouser, ComponentLink6Description=https://datasheet.ciiva.com/46406/1840330-46406109.pdf?src-supplier=Element14, ComponentLink6URL=https://datasheet.ciiva.com/46406/1840330-46406109.pdf?src-supplier=Element14, ComponentLink7Description=https://datasheet.ciiva.com/46406/1788337-46406175.pdf?src-supplier=Element14, ComponentLink7URL=https://datasheet.ciiva.com/46406/1788337-46406175.pdf?src-supplier=Element14, Depth=5.03mm, Fuse Current=5A, Fuse Type="Board Mount (Cartridge Style Excluded)", Height=3.81mm, Lead Free="Lead Free", Length=9.73mm, Mount="Surface Mount,Holder", Number of Pins=2, Packaging="Tape and Reel", Pricing 1="1=3.140000, 5=3.040000, 10=2.935000, 50=2.306200, 100=1.886900, 250=1.834520, 500=1.572460 (USD)", Radiation Hardening=No, REACH SVHC=Unknown, Supplier 1=Digi-Key, Terminal Material=Copper, Termination=SMD/SMT, Voltage Rating (AC)=125V, Voltage Rating (DC)=125V, Width=5.03mm, Working Voltage=125V
F2 F3: library part 0154005.DRT, "LITTELFUSE - 0154001.DRT - FUSE, SMD, 1A, OMNI BLOCK, TIME DELAY", Case/Package=SMD/SMT, Color=White, Current Rating=1A, DC Cold Resistance=225mR, Flammability Rating="UL94 V-0", Manufacturer=Littelfuse, Max Operating Temperature=125°C, Min Operating Temperature=-55°C, Package Quantity=1500, Power Dissipation=125W, Supplier Part Number 1=F1303TR-ND, Voltage Rating=125V, Approvals=UL,PSE, Body Material=Thermoplastic, Category=Fuses, ComponentLink1Description=https://datasheet.ciiva.com/1268/1840330-1268625.pdf?src-supplier=Element14, ComponentLink1URL=https://datasheet.ciiva.com/1268/1840330-1268625.pdf?src-supplier=Element14, ComponentLink2Description=https://datasheet.ciiva.com/4485/littelfuse-fuseblocks-154-155-4485399.pdf?src-supplier=Mouser, ComponentLink2URL=https://datasheet.ciiva.com/4485/littelfuse-fuseblocks-154-155-4485399.pdf?src-supplier=Mouser, ComponentLink3Description=https://datasheet.ciiva.com/14102/aa154xxx-data-e-14102970.pdf?src-supplier=Distrelec, ComponentLink3URL=https://datasheet.ciiva.com/14102/aa154xxx-data-e-14102970.pdf?src-supplier=Distrelec, ComponentLink4Description=https://datasheet.ciiva.com/46406/1840330-46406107.pdf?src-supplier=Element14, ComponentLink4URL=https://datasheet.ciiva.com/46406/1840330-46406107.pdf?src-supplier=Element14, ComponentLink5Description=https://datasheet.ciiva.com/46406/1788337-46406172.pdf?src-supplier=Element14, ComponentLink5URL=https://datasheet.ciiva.com/46406/1788337-46406172.pdf?src-supplier=Element14, ComponentLink6Description=https://datasheet.ciiva.com/22712/1840330-22712958.pdf?src-supplier=Element14, ComponentLink6URL=https://datasheet.ciiva.com/22712/1840330-22712958.pdf?src-supplier=Element14, Depth=5.03mm, Fuse Current=1A, Fuse Type="Board Mount (Cartridge Style Excluded)", Height=3.81mm, Lead Free="Lead Free", Length=9.73mm, Manufacturer Part Number=0154001.DRT, Mount="Surface Mount,Holder", Number of Pins=2, Packaging="Tape and Reel", Pricing 1="1500=1.31037, 3000=1.23890, 7500=1.19125 (USD)", Radiation Hardening=No, REACH SVHC=Unknown, Supplier 1=Digi-Key, Terminal Material=Copper, Voltage Rating (AC)=125V, Voltage Rating (DC)=125V, Width=5.03mm, Working Voltage=125V
H2: library part TERM_3P, "Stepper position potentiometer"
H4: library part TERM_2x4P
L1: "FIXED IND 4.7UH 6.5A 30.8 MOHM", Case/Package=Nonstandard, Current Rating=6.5A, DC Resistance (DCR)=30.8mR, Inductance=4.7uH, Inductance Tolerance=20%, Manufacturer=Bourns, Manufacturer Part Number=SRP7050TA-4R7M, Max Operating Temperature=150°C, Min Operating Temperature=-40°C, Ratings=AEC-Q200, Saturation Current=10A, Self Resonant Frequency=22MHz, Supplier Part Number 1=SRP7050TA-4R7MCT-ND, Test Frequency=100kHz, Category="Fixed Inductors", ComponentLink1Description=http://www.bourns.com/docs/Product-Datasheets/SRP7050TA.pdf?src-supplier=Digi-Key, ComponentLink1URL=http://www.bourns.com/docs/Product-Datasheets/SRP7050TA.pdf?src-supplier=Digi-Key, ComponentLink2Description=http://www.farnell.com/datasheets/1955472.pdf?src-supplier=Element14, ComponentLink2URL=http://www.farnell.com/datasheets/1955472.pdf?src-supplier=Element14, ComponentLink3Description=https://www.bourns.com/docs/Product-Datasheets/SRP7050TA.pdf?src-supplier=Digi-Key, ComponentLink3URL=https://www.bourns.com/docs/Product-Datasheets/SRP7050TA.pdf?src-supplier=Digi-Key, Composition=Wirewound, Core Material="Carbonyl Powder", Height - Seated (Max)=0.197inch, Length=0.287inch, Mount="Surface Mount", Packaging="Cut Tape", Pricing 1="1=1.42000, 10=1.32300, 25=1.22120, 50=1.01760, 100=0.95650, 250=0.85472 (USD)", REACH SVHC="No SVHC", RMS Current (Irms)=6.5A, Shielding=Shielded, Supplier 1=Digi-Key, Tolerance=20%, Width=0.26inch
L2 L3: library part IND-0603, "Ferrite Beads Multi-Layer Power 1KOhm 25% 100MHz 1A 200mOhm DCR 0603 Automotive T/R", Case Code (Imperial)=0603, Case Code (Metric)=1608, DC Resistance (DCR)=200mR, Manufacturer=Murata, Max Current Rating=1A, Max Operating Temperature=125°C, Min Operating Temperature=-55°C, Ratings=AEC-Q200, Supplier Part Number 1=490-17350-1-ND, Case/Package=0603, ComponentLink1Description=https://www.murata.com/~/media/webrenewal/support/library/catalog/products/emc/emifil/c51e.ashx?la=en-us&src-supplier=Digi-Key, ComponentLink1URL=https://www.murata.com/~/media/webrenewal/support/library/catalog/products/emc/emifil/c51e.ashx?la=en-us&src-supplier=Digi-Key, ComponentLink2Description=https://www.murata.com/en-us/products/productdata/8796750610462/QNFA9122.pdf?src-supplier=Digi-Key, ComponentLink2URL=https://www.murata.com/en-us/products/productdata/8796750610462/QNFA9122.pdf?src-supplier=Digi-Key, Manufacturer Part Number=BLM18KG102SZ1D, Mount="Surface Mount", Number of Lines=1, Packaging="Cut Tape", Supplier 1=Digi-Key
Q1: "MOSFET 12V N-Ch Enh FET 2426pF 27.3nC", Capacitance=2.426E-09F, Case/Package=TO-236-3, Continuous Drain Current (ID)=9.3A, Drain to Source Breakdown Voltage=12V, Drain to Source Resistance=41mR, Gate to Source Voltage (Vgs)=4.5V, Input Capacitance=2.426nF, Manufacturer=Diodes, Manufacturer Part Number=DMN1019USN-7, Max Operating Temperature=150°C, Max Power Dissipation=680mW, Min Operating Temperature=-55°C, Package Quantity=3000, Supplier Part Number 1=DMN1019USN-7DICT-ND, Category=MOSFETs, ComponentLink1Description=http://www.farnell.com/datasheets/2814395.pdf?src-supplier=Farnell, ComponentLink1URL=http://www.farnell.com/datasheets/2814395.pdf?src-supplier=Farnell, ComponentLink2Description=http://www.mouser.com/ds/2/115/DMN1019USN-336718.pdf?src-supplier=Mouser, ComponentLink2URL=http://www.mouser.com/ds/2/115/DMN1019USN-336718.pdf?src-supplier=Mouser, ComponentLink3Description=https://www.diodes.com/assets/Datasheets/DMN1019USN.pdf?src-supplier=Digi-Key, ComponentLink3URL=https://www.diodes.com/assets/Datasheets/DMN1019USN.pdf?src-supplier=Digi-Key, ComponentLink4Description=http://www.farnell.com/datasheets/2814395.pdf?src-supplier=Newark, ComponentLink4URL=http://www.farnell.com/datasheets/2814395.pdf?src-supplier=Newark, Drain to Source Voltage (Vdss)=12V, Element Configuration=Single, Fall Time=16.8ns, Lead Free="Lead Free", Mount="Surface Mount", Number of Channels=1, Packaging="Tape and Reel", Pricing 1="1=0.43000, 10=0.34700, 25=0.31800, 100=0.19960, 250=0.19740, 500=0.18482, 1000=0.12568 (USD)", Rds On Max=10mR, Rise Time=57.6ns, Supplier 1=Digi-Key, Turn-Off Delay Time=22.2ns, Turn-On Delay Time=7.6ns, Weight=0.000282oz
"Q4_Box Actuator A" "Q4_Box Actuator B" "Q4_Light A" "Q4_Light B": "Trans MOSFET N-CH 60V 2A Automotive 3-Pin SOT-23 T/R", Manufacturer=Vishay, Manufacturer Part Number=SQ2364EES-T1_GE3, Supplier Part Number 1=SQ2364EES-T1_GE3CT-ND, ComponentLink1Description=http://www.farnell.com/datasheets/2611857.pdf?src-supplier=Farnell, ComponentLink1URL=http://www.farnell.com/datasheets/2611857.pdf?src-supplier=Farnell, ComponentLink2Description=http://www.farnell.com/datasheets/2611857.pdf?src-supplier=Newark, ComponentLink2URL=http://www.farnell.com/datasheets/2611857.pdf?src-supplier=Newark, Pricing 1="1=0.58000, 10=0.49500, 25=0.46200, 100=0.34320, 250=0.32604, 500=0.26796, 1000=0.21780 (USD)", Supplier 1=Digi-Key
R1: "Res Thick Film 0603 91K Ohm 1% 1/10W ±100ppm/°C Molded SMD SMD Paper T/R", Case Code (Imperial)=0603, Case Code (Metric)=1608, Manufacturer=Vishay, Manufacturer Part Number=CRCW060391K0FKEA, Max Operating Temperature=155°C, Max Power Dissipation=100mW, Min Operating Temperature=-55°C, Package Quantity=10, Resistance=91k, Supplier Part Number 1=541-91.0KHCT-ND, Temperature Coefficient=100ppm/°C, Tolerance=1%, Voltage Rating=75V, Case/Package=0603, Category="Chip SMD Resistors", ComponentLink1Description=https://datasheet.ciiva.com/11810/0900766b80d98afc-11810338.pdf?src-supplier=RSComponents, ComponentLink1URL=https://datasheet.ciiva.com/11810/0900766b80d98afc-11810338.pdf?src-supplier=RSComponents, ComponentLink2Description=https://datasheet.ciiva.com/2513/dcrcwe3-2513648.pdf?src-supplier=Digi-Key, ComponentLink2URL=https://datasheet.ciiva.com/2513/dcrcwe3-2513648.pdf?src-supplier=Digi-Key, ComponentLink3Description=https://datasheet.ciiva.com/2513/dcrcwe3-2513649.pdf?src-supplier=Digi-Key, ComponentLink3URL=https://datasheet.ciiva.com/2513/dcrcwe3-2513649.pdf?src-supplier=Digi-Key, ComponentLink4Description=https://datasheet.ciiva.com/7816/1697337-7816085.pdf?src-supplier=Element14, ComponentLink4URL=https://datasheet.ciiva.com/7816/1697337-7816085.pdf?src-supplier=Element14, ComponentLink5Description=https://datasheet.ciiva.com/16397/dcrcwe3-16397320.pdf?src-supplier=Future+Electronics, ComponentLink5URL=https://datasheet.ciiva.com/16397/dcrcwe3-16397320.pdf?src-supplier=Future+Electronics, ComponentLink6Description=https://datasheet.ciiva.com/16771/70201119-16771080.pdf?src-supplier=Allied+Electronics, ComponentLink6URL=https://datasheet.ciiva.com/16771/70201119-16771080.pdf?src-supplier=Allied+Electronics, ComponentLink7Description=https://datasheet.ciiva.com/26317/fld-crcw-e3-data-en-26317164.pdf?src-supplier=Distrelec, ComponentLink7URL=https://datasheet.ciiva.com/26317/fld-crcw-e3-data-en-26317164.pdf?src-supplier=Distrelec, ComponentLink8Description=https://datasheet.ciiva.com/8984/dcrcwe3-8984413.pdf?src-supplier=Avnet, ComponentLink8URL=https://datasheet.ciiva.com/8984/dcrcwe3-8984413.pdf?src-supplier=Avnet, ComponentLink9Description=https://datasheet.ciiva.com/5547/dcrcwe3-109170-5547038.pdf?src-supplier=Mouser, ComponentLink9URL=https://datasheet.ciiva.com/5547/dcrcwe3-109170-5547038.pdf?src-supplier=Mouser, ComponentLink10Description=https://datasheet.ciiva.com/2513/dcrcwe3-2513647.pdf?src-supplier=Digi-Key, ComponentLink10URL=https://datasheet.ciiva.com/2513/dcrcwe3-2513647.pdf?src-supplier=Digi-Key, Composition="Thick Film", Contact Plating=Tin, Depth=0.85mm, Features="Automotive AEC-Q200", Height=0.45mm, Lead Free="Lead Free", Length=1.55mm, Military Standard=Not, Mount="Surface Mount", Number of Pins=2, Number of Terminations=2, Packaging="Tape and Reel", Power Rating=100mW, Pricing 1="1=0.10000, 10=0.03400, 100=0.01390, 1000=0.00623, 2500=0.00540 (USD)", Radiation Hardening=No, REACH SVHC=Unknown, Supplier 1=Digi-Key, Termination=SMD/SMT, Voltage Rating (DC)=75V, Weight=7.1E-05oz, Width=0.033inch